# Altium PCB SV601121A.PcbDoc (part 1 of 2)
Units mil, origin at the board's own origin, x right, y up, seen from the top; angles counter-clockwise.
Board outline 1980 x 1700 mil, 6 copper layers (Top Layer, MidLayer1, MidLayer2, Mid-Layer 3, Mid-Layer 4, Bottom Layer), stack 61.3 mil thick; 85 components, 35 nets, 187 pads, 175 vias.
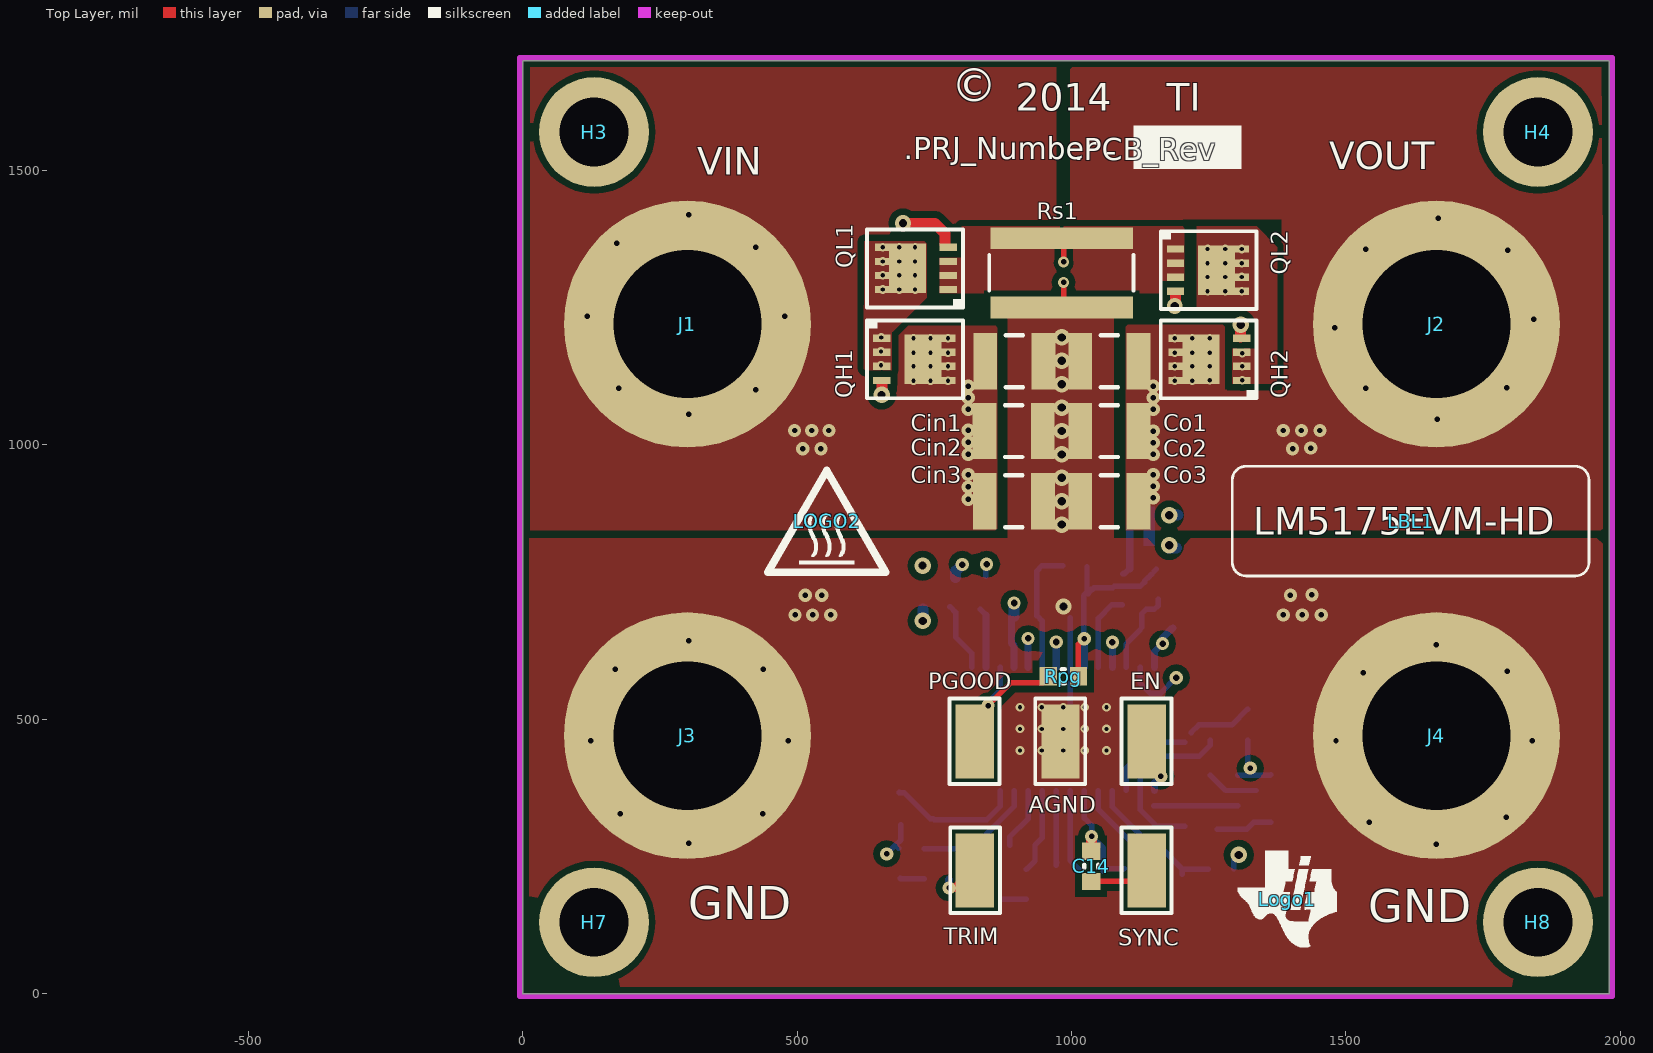
[diagram p0: Top Layer view]
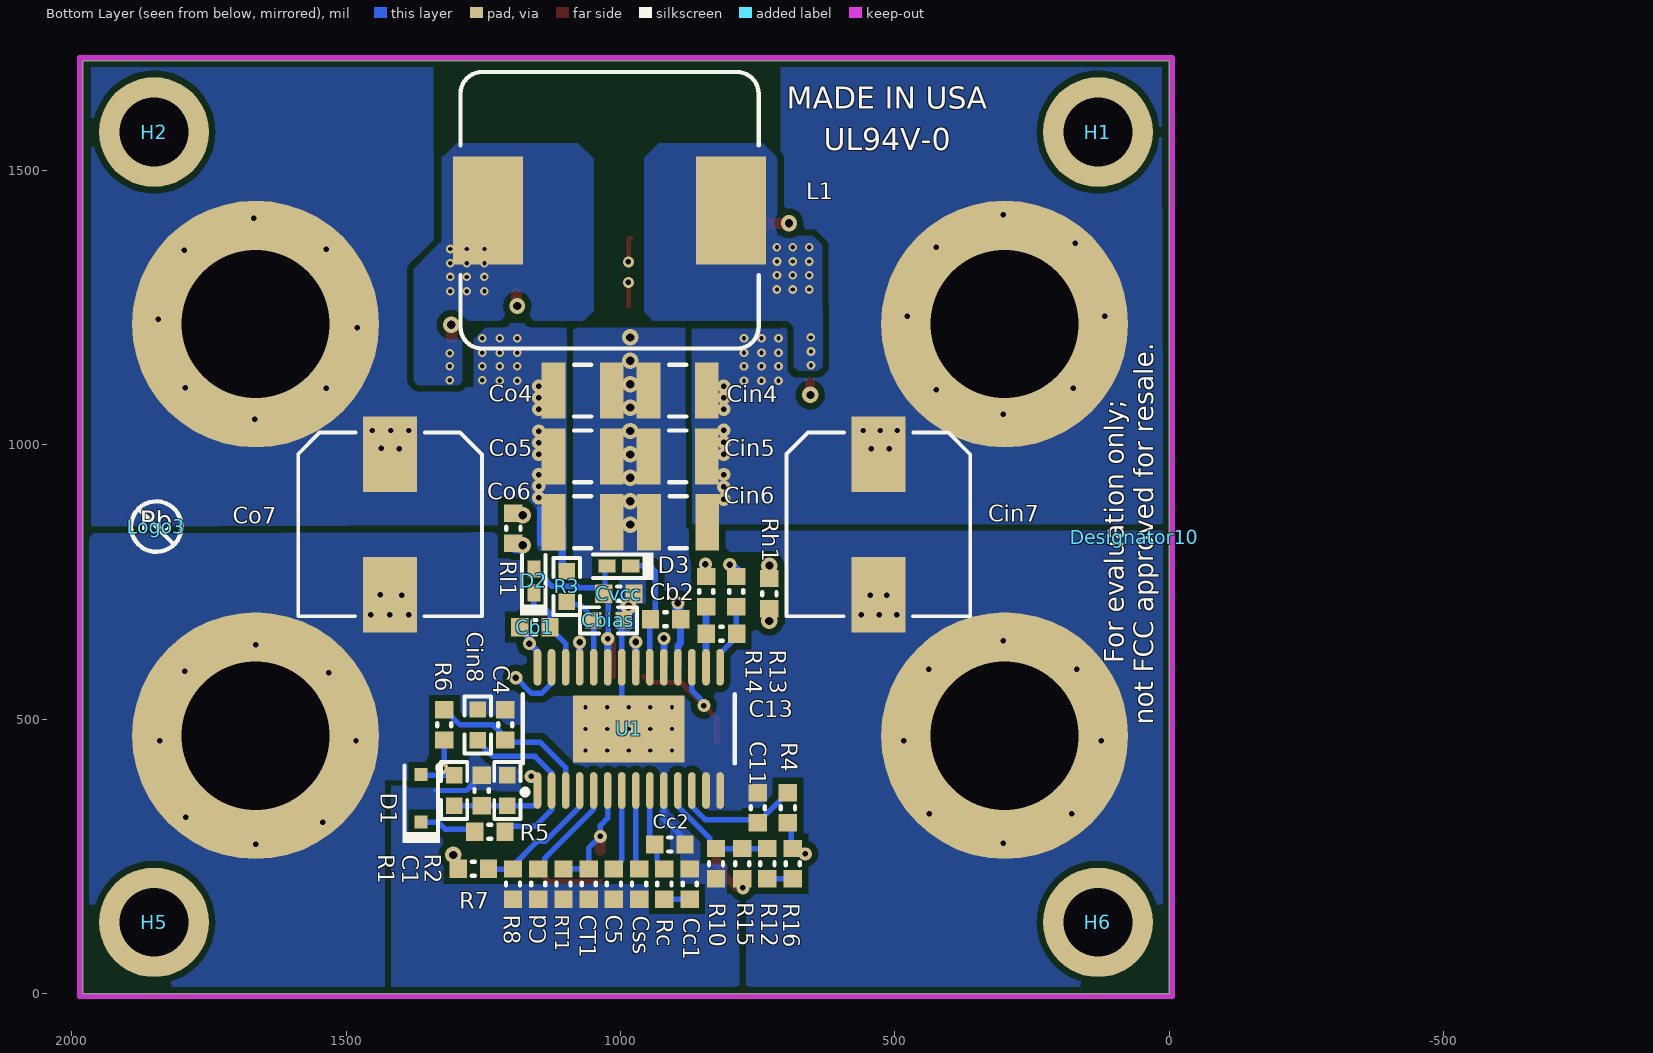
[diagram p1: Bottom Layer view, seen from below]
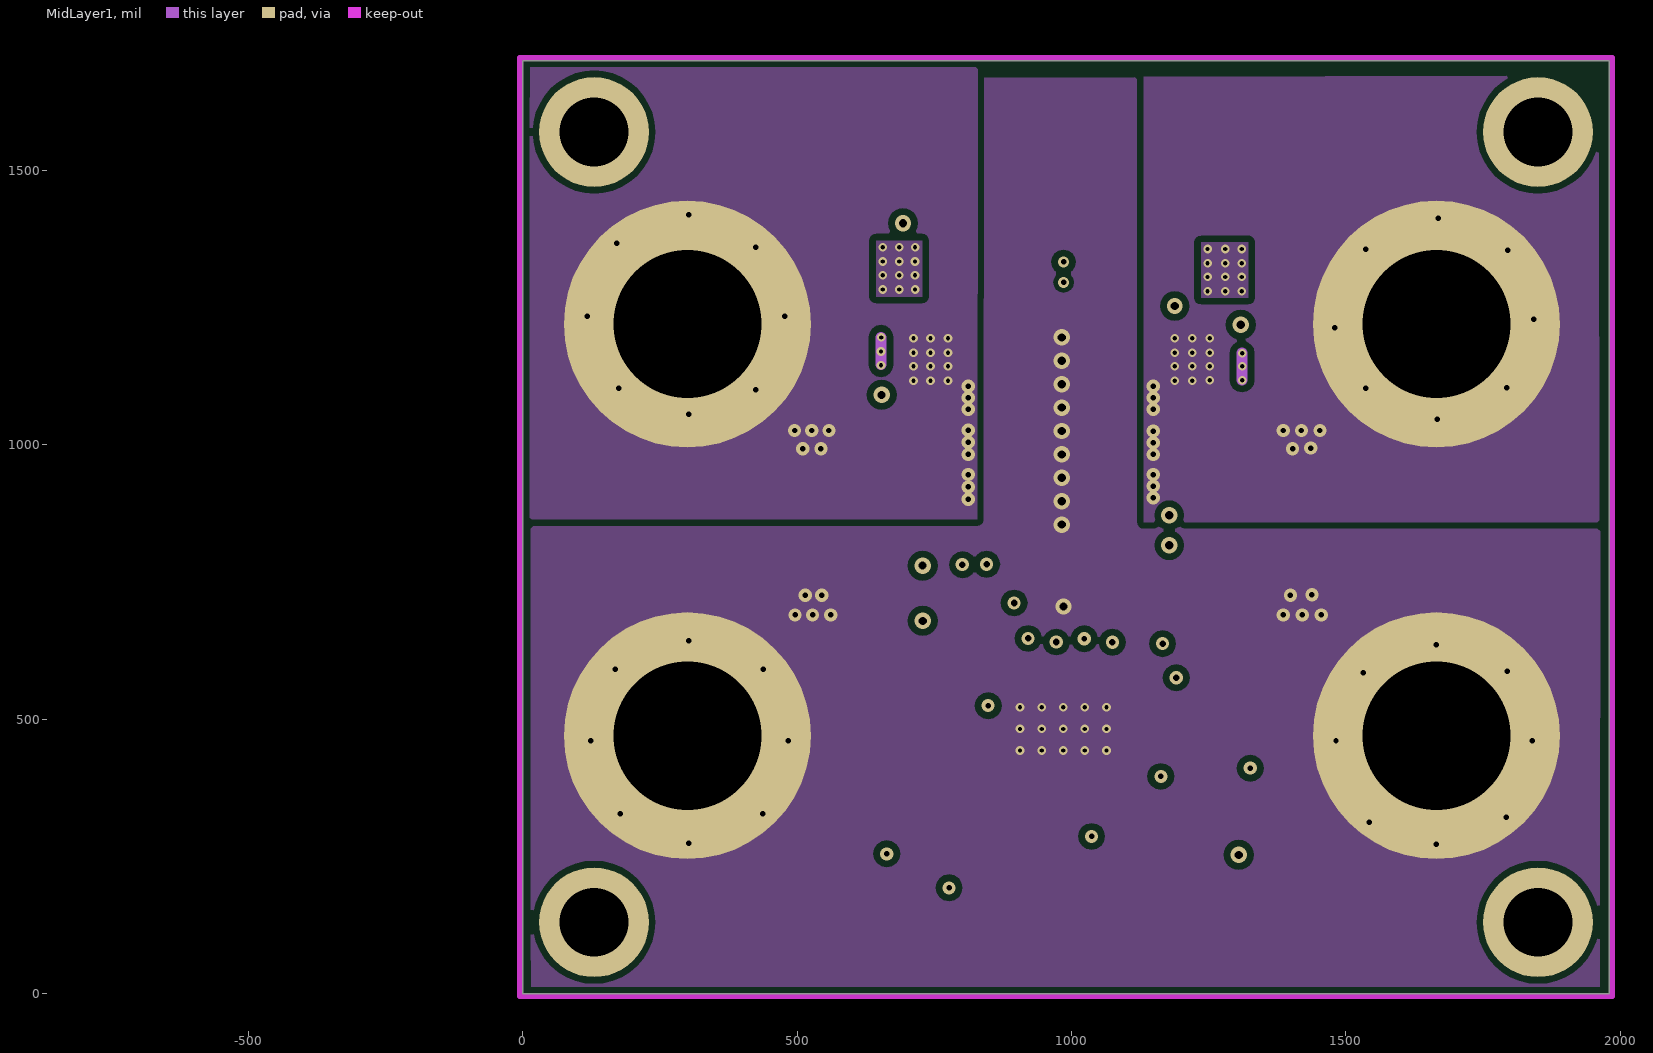
[diagram p2: MidLayer1]
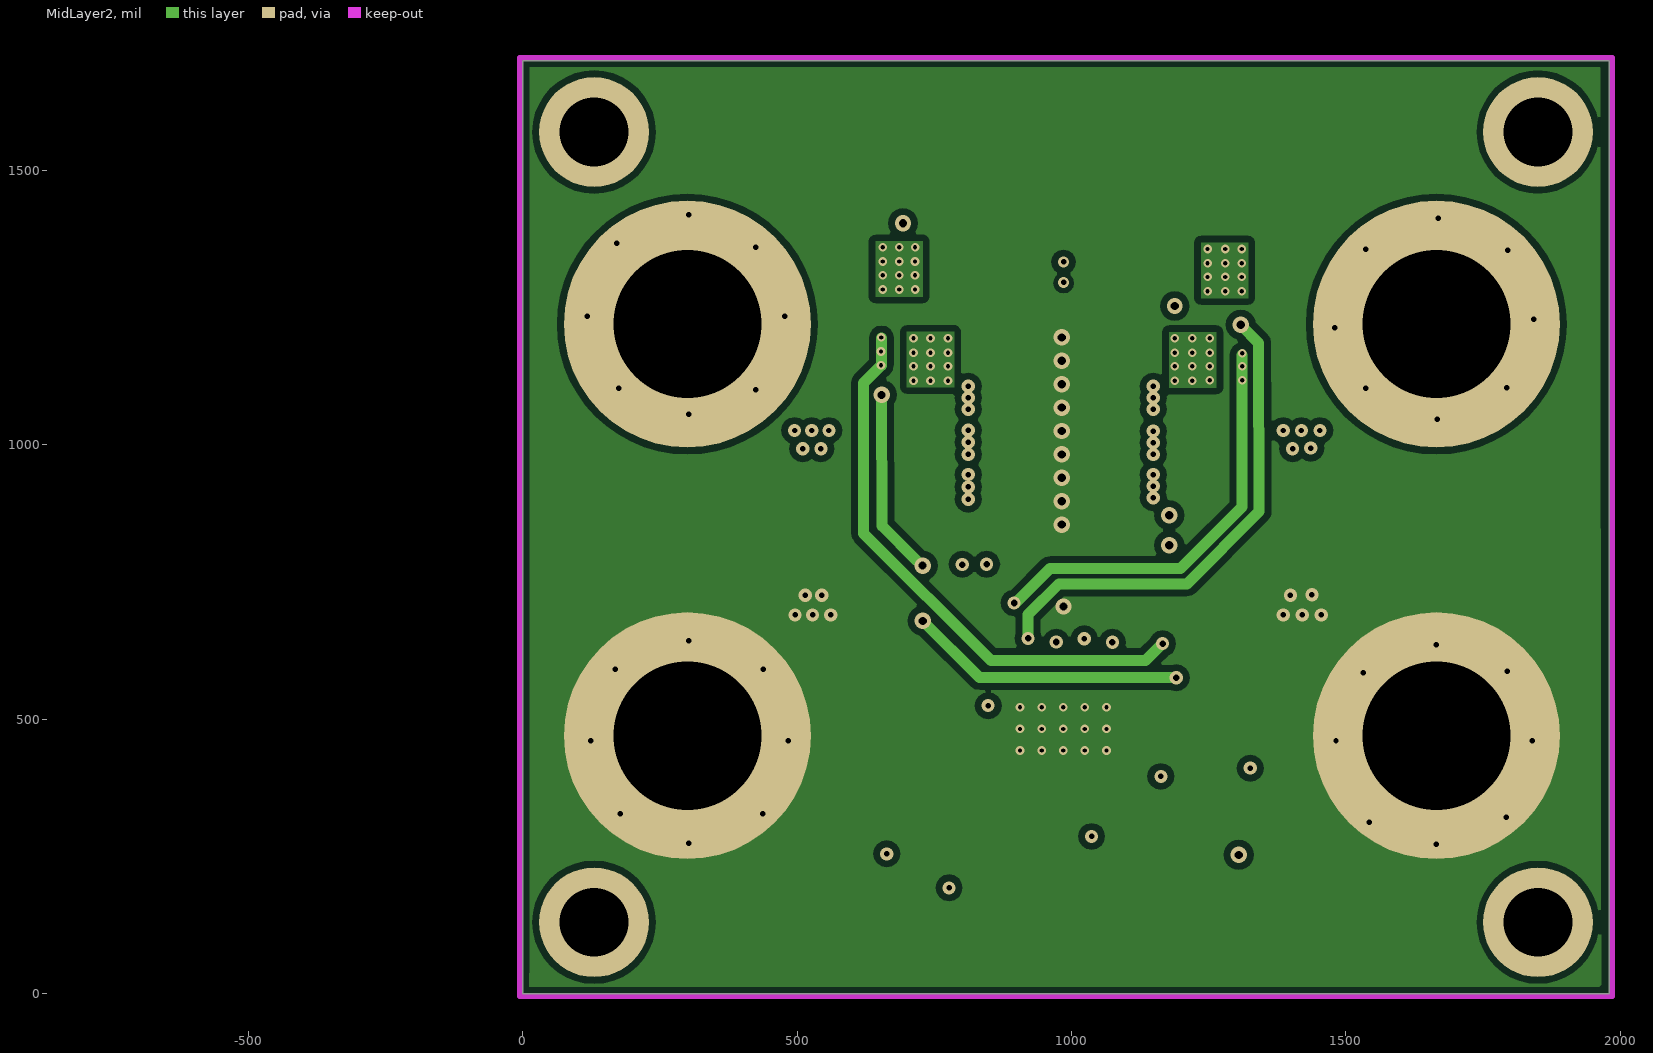
[diagram p3: MidLayer2]
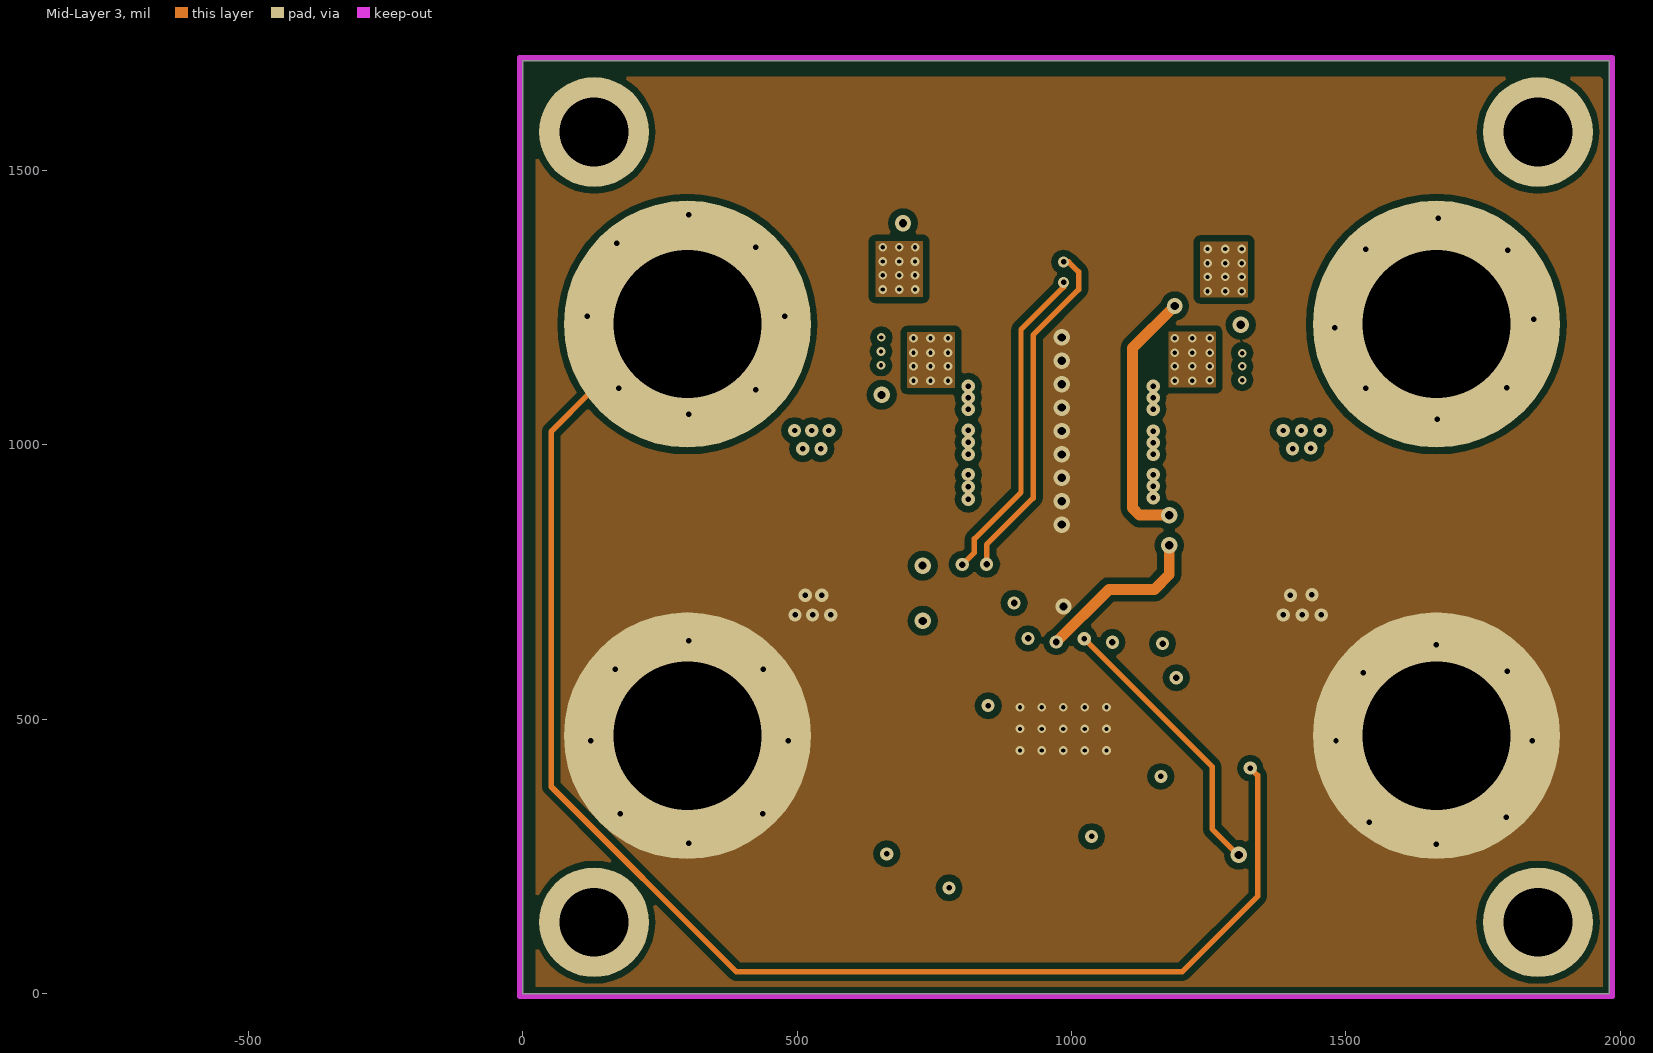
[diagram p4: Mid-Layer 3]
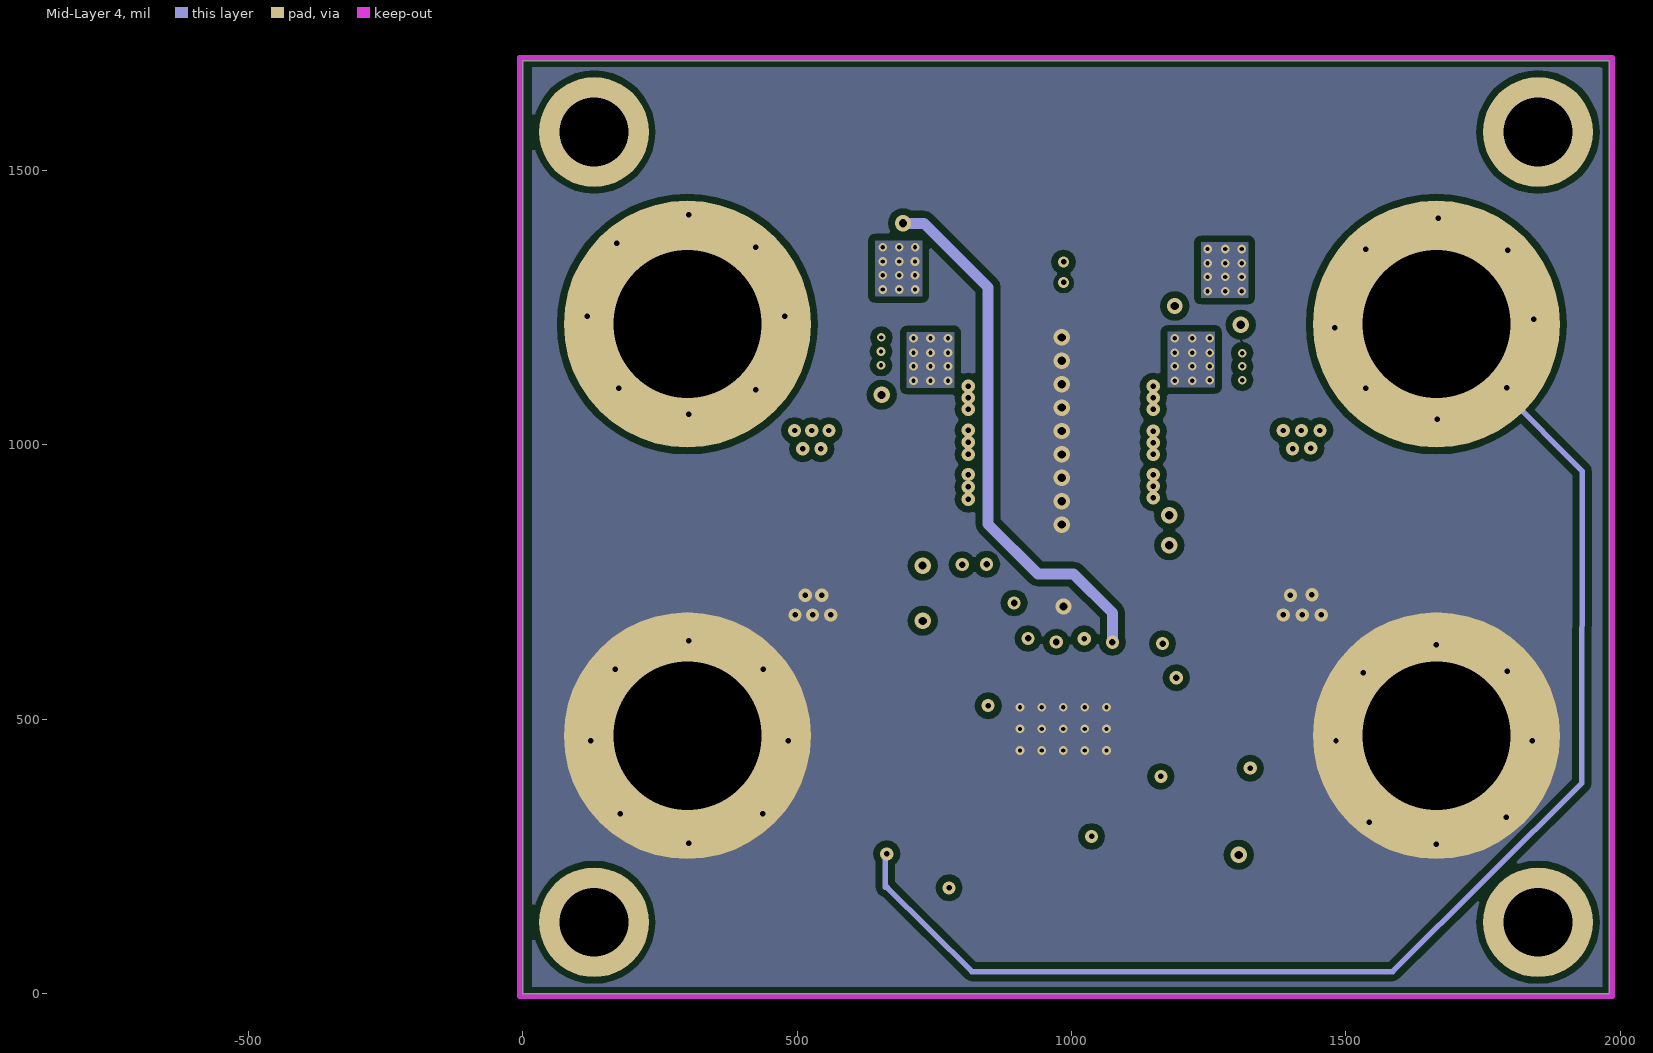
[diagram p5: Mid-Layer 4]

## Layer stack, top to bottom
Top Solder: solder mask 0.4, Solder Resist, Dk 3.5
Top Layer: signal copper 2.8
Dielectric1: core 8.9, FR-4, Dk 4.8
MidLayer1: signal copper 2.8
Dielectric2: prepreg 8.9, FR-4, Dk 4.8
MidLayer2: signal copper 2.8
Dielectric3: core 8.9, FR-4, Dk 4.8
Mid-Layer 3: signal copper 2.8
Dielectric4: prepreg 8.9, FR-4, Dk 4.8
Mid-Layer 4: signal copper 2.8
Dielectric5: core 8.9, FR-4, Dk 4.8
Bottom Layer: signal copper 2.8
Bottom Solder: solder mask 0.4, Solder Resist, Dk 3.5

## Board outline
0,0 0,1700 1980,1700 1980,0

## Design rules (kind name [scope] priority, off if disabled: settings)
AcuteAngle [All] p1: minimum=4.50000000000000E+0001 checktracksonly=FALSE
AssemblyTestPointUsage [All] p1: valid=2
Clearance Clearance_2 [InNet('NetQl1_1')] p1: gap=12 ignorepadtopadclearanceinfootprint=FALSE except(0: Arc-Hole Track-Hole SMDPad-Hole THPad-Hole Via-Hole Fill-Hole Poly-Hole Region-Hole Text-Hole)
Clearance Clearance_1 [InPolygon] p2: gap=12 ignorepadtopadclearanceinfootprint=FALSE except(0: Arc-Hole Track-Hole SMDPad-Hole THPad-Hole Via-Hole Fill-Hole Poly-Hole Region-Hole Text-Hole)
Clearance "Clearance_Polygon Board Edge" [InPolygon and OnCopper vs IsKeepout] p3: gap=25 ignorepadtopadclearanceinfootprint=FALSE except(0: Arc-Hole Track-Hole SMDPad-Hole THPad-Hole Via-Hole Fill-Hole Poly-Hole Region-Hole Text-Hole)
Clearance [All] p4: gap=8 ignorepadtopadclearanceinfootprint=FALSE except(0: Arc-Hole Track-Hole SMDPad-Hole THPad-Hole Via-Hole Fill-Hole Poly-Hole Region-Hole Text-Hole)
ComponentClearance ComponentClearance_1 [HasFootprint('SOT-23') vs HasFootprint('SOT-23')] p1: gap=5 collisioncheckmode=3 verticalgap=5 showdistances=FALSE
ComponentClearance "Output Cap Clearance" [InComponent('CO6') vs InComponent('CO7')] p2: gap=10 collisioncheckmode=3 verticalgap=0 showdistances=FALSE
ComponentClearance "MOSFET Clearance" [HasFootprint('PG-TDSON-8') vs HasFootprint('PG-TDSON-8')] p3: gap=10 collisioncheckmode=3 verticalgap=0 showdistances=FALSE
ComponentClearance ComponentClearance_Logo [InComponentClass('Logo')] p4: gap=5 collisioncheckmode=3 verticalgap=5 showdistances=FALSE
ComponentClearance ComponentClearance_ScrewToNut [(HasFootprint('NY PMS 440 0025 PH')) vs (HasFootprint('Keystone_1902C'))] p5: gap=5 collisioncheckmode=3 verticalgap=10 showdistances=FALSE
ComponentClearance ComponentClearance_MountingHoles [InComponentClass('Mounting Holes')] p6: gap=5 collisioncheckmode=3 verticalgap=100000 showdistances=FALSE
ComponentClearance ComponentClearance_SmallPassives [HasFootprint('0201*') or HasFootprint('0402*') or HasFootprint('0508') or HasFootprint('0603*') or HasFootprint('0612') or HasFootprint('0805*') or HasFootprint('0815*') or HasFootprint('0830*') or HasFootprint('1206*') or HasFootprint('1210*') or HasFootprint('1808*') or HasFootprint('1812*') or HasFootprint('1825*') or HasFootprint('2010*') or HasFootprint('2220*') or HasFootprint('2225*') or HasFootprint('2512*') or HasFootprint('2728*') or HasFootprint('3518*') vs HasFootprint('0201*') or HasFootprint('0402*') or HasFootprint('0508') or HasFootprint('0603*') or HasFootprint('0612') or HasFootprint('0805*') or HasFootprint('0815*') or HasFootprint('0830*') or HasFootprint('1206*') or HasFootprint('1210*') or HasFootprint('1808*') or HasFootprint('1812*') or HasFootprint('1825*') or HasFootprint('2010*') or HasFootprint('2220*') or HasFootprint('2225*') or HasFootprint('2512*') or HasFootprint('2728*') or HasFootprint('3518*')] p7: gap=8 collisioncheckmode=3 verticalgap=2 showdistances=FALSE
ComponentClearance ComponentClearance_THtoSMT [IsThruComponent vs IsSMTComponent] p8: gap=10 collisioncheckmode=3 verticalgap=20 showdistances=FALSE
ComponentClearance ComponentClearance_THtoTH [IsThruComponent vs IsThruComponent] p9: gap=20 collisioncheckmode=3 verticalgap=30 showdistances=FALSE
ComponentClearance [All] p10: gap=10 collisioncheckmode=3 verticalgap=5 showdistances=TRUE
DiffPairsRouting [All] p1: maxlimit=100 minlimit=10 mostfreqgap=10 toplayer_minwidth=15 toplayer_maxwidth=15 toplayer_prefwidth=15 midlayer1_minwidth=15 midlayer1_maxwidth=15 midlayer1_prefwidth=15 midlayer2_minwidth=15 midlayer2_maxwidth=15 midlayer2_prefwidth=15 midlayer3_minwidth=15 midlayer3_maxwidth=15 midlayer3_prefwidth=15 midlayer4_minwidth=15 midlayer4_maxwidth=15 midlayer4_prefwidth=15 bottomlayer_minwidth=15 bottomlayer_maxwidth=15 bottomlayer_prefwidth=15 maxuncoupledlength=1000
FabricationTestPointUsage TestPointUsage [All] p1: valid=2 allowmultiple=FALSE
FabricationTestpoint Testpoint [All] p1: side=3 testpointundercomponent=TRUE minsize=40 maxsize=100 preferedsize=60 minholesize=0 maxholesize=40 preferedholesize=32 testpointgrid=1 allowsidetop=TRUE allowsidebottom=TRUE usegrid=TRUE gridtolerance=0.01
FanoutControl Fanout_LCC [IsLCC] p1: bgadir=Out bgaviamode=Centered fanoutstyle=Auto fanoutdirection=Alternating viagrid=1 // Fanout_LCC (Default Rule)
FanoutControl Fanout_BGA [IsBGA] p2: bgadir=Out bgaviamode=Centered fanoutstyle=Auto fanoutdirection=Alternating viagrid=1 // Fanout_BGA (Default Rule)
FanoutControl Fanout_Default [All] p4: bgadir=Out bgaviamode=Centered fanoutstyle=Auto fanoutdirection=Alternating viagrid=1 // Fanout_Default (Default Rule)
FanoutControl Fanout_Small [(CompPinCount < 5)] p5: bgadir=Out bgaviamode=Centered fanoutstyle=Auto fanoutdirection=OutThenIn viagrid=1 // Fanout_Small (Default Rule)
HoleSize [All] p1: absolutevalues=TRUE maxlimit=280 minlimit=6 maxpercent=80.000 minpercent=20.000
HoleToHoleClearance [All] p1: gap=5 allowstackedmicrovias=TRUE
MinimumAnnularRing [All] p1: minimumring=2
MinimumSolderMaskSliver MinimumSolderMaskSliver_Logo [InComponentClass('Logo') vs InComponentClass('Logo')] p1: minsoldermaskwidth=0.7
MinimumSolderMaskSliver [All] p2: minsoldermaskwidth=2
PlaneClearance [All] p1: clearance=15
PlaneConnect [All] p1: planeconnectstyle=Direct reliefexpansion=10 reliefentries=4 reliefconductorwidth=10 reliefairgap=10
PolygonConnect [All] p1: connectstyle=Direct reliefconductorwidth=10 reliefentries=4 polygonreliefangle="90 Angle" airgapwidth=10
RoutingVias [All] p1: holewidth=12 width=24 viastyle="Through Hole" minholewidth=7.87 minwidth=15.75 maxholewidth=40 maxwidth=65
SMDToCorner [All] p1: distance=0
SilkToBoardRegionClearance [NOT((IsComment OR IsDesignator) AND (Hide <> 'FAIL'))AND NOT InRegion (100,500,4000,800)] p1:
SilkToSilkClearance [All vs All  AND NOT (InComponent('Logo3'))] p1: silktosilkclearance=2
SilkToSolderMaskClearance SilkscreenOverComponentPads [IsPad] p1: minsilkscreentomaskgap=1 clearancetoexposedcopper=TRUE
SolderMaskExpansion [All] p1: expansion=3 istentingtop=FALSE
Width [All] p1: maxlimit=100 minlimit=6 preferedwidth=10 checkconnectedcopper=TRUE
13 further rules are at their usual default settings.

## Classes and differential pairs
component class "Mounting Holes": H3 H4 H7 H8
component class Logo: Logo1
component class SV601121A_HW: Designator10 H1 H2 H3 H4 H5 H6 H7 H8 LBL1 Logo1 LOGO2 Logo3 ZZ1 ZZ2 ZZ3 ZZ4
component class AssemblyNote: ZZ1 ZZ2 ZZ3 ZZ4
component class Label: LBL1
component class SV601121A: 6 AGND C1 C3 C4 C5 C11 C13 C14 Cb1 Cb2 Cbias Cc1 Cc2 Cd Cin1 Cin2 Cin3 Cin4 Cin5 Cin6 Cin7 Cin8 CO1 CO2 CO3 CO4 CO5 CO6 Co7 Css CT1 Cvcc D1 D2 D3 EN J1 J2 J3 J4 L1 NT1 PGOOD QH1 QH2 QL1 QL2 R1 R2 R3 R4 R5 R6 R7 R8 R10 R12 R13 R14 R15 R16 Rc Rh1 Rl1 Rpg Rs1 RT1 SYNC TRIM U1

## Components (designator, comment, footprint, x,y, rotation, side; value= is the part's Value field where it differs from the comment)
AGND "5015" Testpoint_Keystone_Miniature 980,459.75 r270 top
C1 "GRM1885C1H101JA01D" 0603L 1253.16,370.16 r270 bottom
C4 "GRM1885C1H101JA01D" 0603L 1210,489.75 r270 bottom
C5 "GRM1885C1H121JA01D" 0603L 1012,199.75 r270 bottom
C11 "GRM1885C1H101JA01D" 0603L 750,338.75 r90 bottom
C13 "GRM1885C1H470JA01D" 0603L 816,655.75 r0 bottom
C14 "CGA3E2NP01H101J080AA" 0603L 1035.77,232 r270 top
Cb1 "GCM188R71H104KA57D" 0603L 1155.96,667.75 r0 bottom
Cb2 "GCM188R71H104KA57D" 0603L 917.96,682 r0 bottom
Cbias "C1608X7R1H224K080AB" 0603_HV 1021.96,680 r180 bottom
Cc1 "GRM188R71H223KA01D" 0603L 874,199.75 r90 bottom
Cc2 "GRM1885C1H221JA01D" 0603L 910,271.75 r0 bottom
Cd "RC0603JR-070RL" 0603L 1150,199.75 r90 bottom
Cin1 "GRM32ER71H106KA12L" 1210L 895.96,1152.37 r0 top
Cin2 "GRM32ER71H106KA12L" 1210L 894.51,1025.14 r0 top
Cin3 "GRM32ER71H106KA12L" 1210L 895.12,897.08 r0 top
Cin4 "GRM32ER71H106KA12L" 1210L 895.96,1098.75 r0 bottom
Cin5 "GRM32ER71H106KA12L" 1210L 895.96,979 r0 bottom
Cin6 "GRM32ER71H106KA12L" 1210L 894.96,859 r0 bottom
Cin7 "EEHZC1H680P" SM_RADIAL_8MM 530,855 r270 bottom
Cin8 "C1608X7R1H224K080AB" 0603_HV 1260,489.75 r90 bottom
Co1 "GRM32ER71H106KA12L" 1210L 1069.11,1152.37 r180 top
Co2 "GRM32ER71H106KA12L" 1210L 1069.11,1025.14 r180 top
Co3 "GRM32ER71H106KA12L" 1210L 1069.11,897.08 r180 top
Co4 "GRM32ER71H106KA12L" 1210L 1068.96,1098.75 r180 bottom
Co5 "GRM32ER71H106KA12L" 1210L 1068.96,979 r180 bottom
Co6 "GRM32ER71H106KA12L" 1210L 1068.96,859 r180 bottom
Co7 "EEHZC1H680P" SM_RADIAL_8MM 1420,855 r270 bottom
Css "GRM188R71H473KA61D" 0603L 966.16,199.75 r270 bottom
CT1 "DNP" 0603L 1058,199.75 r90 bottom
Cvcc "GRM188R71C105KA12D" 0603L 1002.9,729 r180 bottom
D1 "BAT54HT1G" sod-323 1363.16,355.75 r90 bottom
D2 "BAS516,115" SOD-523 1158,752 r90 bottom
D3 "BAS516,115" SOD-523 1002.9,779 r0 bottom
Designator10 "FCC disclaimer" FCC_disclaimer_stacked 64,832 r90 bottom
EN "5015" Testpoint_Keystone_Miniature 1137,459.75 r270 top
H1 "1902C" Keystone_1902C 130,1570 r180 bottom
H2 "1902C" Keystone_1902C 1850,1570 r180 bottom
H3 "NY PMS 440 0025 PH" "NY PMS 440 0025 PH" 130,1570 r0 top
H4 "NY PMS 440 0025 PH" "NY PMS 440 0025 PH" 1850,1570 r0 top
H5 "1902C" Keystone_1902C 1850,130 r180 bottom
H6 "1902C" Keystone_1902C 130,130 r180 bottom
H7 "NY PMS 440 0025 PH" "NY PMS 440 0025 PH" 130,130 r0 top
H8 "NY PMS 440 0025 PH" "NY PMS 440 0025 PH" 1850,130 r0 top
J1 "VIN 6V TO 42V" Johnson_108-0740-001 300,1220 r0 top
J2 "VOUT" Johnson_108-0740-001 1665,1220 r180 top
J3 "GND" Johnson_108-0740-001 300,470 r0 top
J4 "GND" Johnson_108-0740-001 1665,470 r180 top
L1 "3.3uH" PIMB135T 1020,1427.41 r0 bottom
LBL1 "LM5175EVM-HD" Label_650x200 1618,861 r0 top
Logo1 "Texas Instruments" TI_Symbol_Overlay_Small 1393,172 r0 top
LOGO2 "CAUTION HOT SURFACE" IEC_HotSurface_Small 554,861 r0 top
Logo3 "Pb-Free Symbol" Pb-Free_Overlay_Small 1846,851 r180 bottom
PGOOD "5015" Testpoint_Keystone_Miniature 824,459.75 r270 top
QH1 "BSZ042N06NS" PG-TSDSON-8 714.96,1155.75 r0 top
QH2 "BSZ0902NS" PG-TSDSON-8 1249.96,1155.75 r180 top
QL1 "BSZ042N06NS" PG-TSDSON-8 714.96,1321.42 r180 top
QL2 "BSZ0902NS" PG-TSDSON-8 1249.96,1318.42 r0 top
R1 "RC0603FR-07200KL" 0603_HV 1303.16,370.16 r90 bottom
R2 "RC0603FR-0752K3L" 0603_HV 1206.16,370.16 r270 bottom
R3 "RC0603FR-0710RL" 0603_HV 1098,742 r90 bottom
R4 "CRCW060310R0FKEA" 0603L 695,338.75 r270 bottom
R5 "RC0603FR-0710RL" 0603L 1238,295 r0 bottom
R6 "RC0603FR-0710RL" 0603L 1321,489.75 r90 bottom
R7 "CRCW06030000Z0EA" 0603L 1268,227.75 r0 bottom
R8 "CRCW0603200KFKEA" 0603L 1196,199.75 r90 bottom
R10 "RC0603FR-077K15L" 0603L 825.96,236.75 r270 bottom
R12 "RC0603FR-07100KL" 0603L 732.29,236.75 r90 bottom
R13 "RC0603FR-07100RL" 0603L 843.56,732.75 r90 bottom
R14 "RC0603FR-07100RL" 0603L 789,732.75 r90 bottom
R15 "RC0603FR-076K65L" 0603L 778,236.75 r90 bottom
R16 "CRCW060350R0FKEA" 0603L 685.96,236.75 r270 bottom
Rc "RC0603FR-073K01L" 0603L 920,199.75 r90 bottom
Rh1 "CRCW06030000Z0EA" 0603L 728.66,728.75 r90 bottom
Rl1 "CRCW06030000Z0EA" 0603L 1195.16,848 r270 bottom
Rpg "RC0603FR-0720KL" 0603L 985.16,578.05 r180 top
Rs1 "0.007" 2512_WIDE 982.03,1313.32 r90 top
RT1 "RC0603FR-0760K4L" 0603L 1104,199.75 r90 bottom
SYNC "5015" Testpoint_Keystone_Miniature 1137,224.75 r270 top
TRIM "5015" Testpoint_Keystone_Miniature 824,224.75 r90 top
U1 "LM5175PWPR" PWP0028F_N 984.96,482.37 r90 bottom
ZZ1 "This Assembly Note is for PCB labels only" AssemblyNoteLabel 264,2684 r0 top
ZZ2 "These assemblies are ESD sensitive, ESD precautions shall be observed." AssemblyNote 248,2566 r0 top
ZZ3 "These assemblies must be clean and free from flux and all contaminants. Use of no clean flux is not acceptable." AssemblyNote 254,2459 r0 top
ZZ4 "These assemblies must comply with workmanship standards IPC-A-610 Class 2., unless otherwise specified." AssemblyNote 254,2335 r0 top

## Footprints (in the part's own frame and the unit in brackets; to place one, negate y for a bottom-side part, rotate by r counter-clockwise, add the part's x,y. Pads: shape width x height; smd on the part's side, far side on the other; paste and mask are expansions set on the pad)
0603_HV [mil] "Ernesto recommended land pattern.  26 mil between pads."
  rect 30x30 smd: 1(-28,0) 2(28,0)
  silkscreen extent -52,-24 52,24, body extent -34,-19 34,19, height 33
0603L [mm] "0603 from SM-752 data"
  rect 0.8x0.85 smd: 1(-0.7,0) 2(0.7,0)
  silkscreen extent -0.07,-0.33 0.07,0.33, body extent -0.87,-0.47 0.87,0.47, height 0.85
1210L [mm] "1210 from SM-752 data"
  rect 1.1x2.6 smd: 1(-1.35,0) 2(1.35,0)
  silkscreen extent -0.4,-1.2 0.4,1.2, body extent -1.7,-1.35 1.7,1.35, height 1.35
2512_WIDE [mm] "Ohmite recommended land pattern"
  rect 1x6.6 smd: 1(-1.6,0) 2(1.6,0)
  silkscreen extent -0.82,-3.32 0.82,3.35, body extent -1.65,-3.25 1.65,3.25, height 0.7
AssemblyNote [mil] "Assembly Note"
AssemblyNoteLabel [mil] "Assembly Note for PCB Labels"
FCC_disclaimer_stacked [mil]
IEC_HotSurface_Small [mil]
  silkscreen extent -107,-93 107,92
Johnson_108-0740-001 [mil] "Banana Jack Uninsulated Standard Type"
  round 450 hole 270: 1(0,0)
  body extent -188,-214 187,219, height 94
Keystone_1902C [mil] "Hex Standoff, 4-40 threaded, nylon"
  body extent -145,-126 146,126, height 501
Label_650x200 [mil] "Thermal Transfer Label"
  round 1 on Mech13: 0(0,0)
  silkscreen extent -325,-100 325,100, body extent -325,-100 325,100, height 1
"NY PMS 440 0025 PH" [mil] "4-40 nylon screw and mounting hole"
  round 200 hole 125: ""(0,0)
  body extent -130,-130 130,130, height 106
Pb-Free_Overlay_Small [mil]
  silkscreen extent -46,-46 46,46
PG-TSDSON-8 [mm] "Infineon recommended land pattern"
  rect 0.8x0.34 smd: 1(-1.538,0.975) 2(-1.538,0.325) 3(-1.538,-0.325) 4(-1.538,-0.975)
  rect 0.65x0.34 smd: 5(1.538,-0.975) 6(1.538,-0.325) 7(1.538,0.325) 8(1.538,0.975)
  rect 1.71x2.29 smd: 9(0.358,0)
  silkscreen extent -2.22,-1.8 2.22,1.8, body extent -1.7,-1.7 1.7,1.7, height 1.1
PIMB135T [mm] "CYNTEC CO."
  rect 3.25x5 smd: 1(-5.625,0) 2(5.625,0)
  silkscreen extent -6.9,-6.4 6.9,6.4, body extent -6.9,-6.4 6.9,6.4, height 5
PWP0028F_N [mm] "TSOP, 28-Leads, Body 9.7x4.4mm, Pitch 0.65mm, Exposed Pad, IPC Medium Density"
  oval 1.7x0.35 smd: 1(-2.85,4.225) 2(-2.85,3.575) 3(-2.85,2.925) 4(-2.85,2.275) 5(-2.85,1.625) 6(-2.85,0.975) 7(-2.85,0.325) 8(-2.85,-0.325) 9(-2.85,-0.975) 10(-2.85,-1.625) 11(-2.85,-2.275) 12(-2.85,-2.925) 13(-2.85,-3.575) 14(-2.85,-4.225) 15(2.85,-4.225) 16(2.85,-3.575) 17(2.85,-2.925) 18(2.85,-2.275) 19(2.85,-1.625) 20(2.85,-0.975) 21(2.85,-0.325) 22(2.85,0.325) 23(2.85,0.975) 24(2.85,1.625) 25(2.85,2.275) 26(2.85,2.925) 27(2.85,3.575) 28(2.85,4.225)
  rect 3.1x5.18 smd: 29(0,0)
  silkscreen extent -3.05,-4.9 1.6,4.93, body extent -3.21,-4.85 3.21,4.85, height 0.98
SM_RADIAL_8MM [mm] "Nichicon 8x10"
  rect 3.5x2.5 smd: 1(-3.25,0) 2(3.25,0)
  silkscreen extent -4.25,-4.25 4.25,4.25, body extent -4.25,-4.25 4.25,4.25, height 10.5
sod-323 [mm] "NXP recommended land pattern"
  rect 0.6x0.6 smd paste-0.05: 1(-1.1,0) 2(1.1,0)
  silkscreen extent -2.06,-0.86 1.53,0.86, body extent -1.3,-0.67 1.3,0.68, height 1.1
SOD-523 [mm] "NXP Semiconductor recommended land pattern, nominal STEP model"
  rect 0.8x0.6 smd paste-0.05: 1(-0.55,0) 2(0.55,0)
  silkscreen extent -1.6,-0.63 1.2,0.64, body extent -0.8,-0.4 0.8,0.4, height 0.72
Testpoint_Keystone_Miniature [mil] "Miniature SMT test point"
  rect 135x70 smd: 1(0,0)
  silkscreen extent -78,-46 78,45, body extent -52,-20 52,20, height 61
TI_Symbol_Overlay_Small [mil]
  silkscreen extent -90,-88 91,88

## Part data
AGND EN PGOOD SYNC TRIM: "Test Point, Miniature, SMT"
C1 C4 C11 C14: "CAP, CERM, 100pF, 50V, +/-5%, C0G/NP0, 0603"
C5: "CAP, CERM, 120pF, 50V, +/-5%, C0G/NP0, 0603"
C13: "CAP, CERM, 47pF, 50V, +/-5%, C0G/NP0, 0603"
Cb1 Cb2: "CAP, CERM, 0.1uF, 50V, +/-10%, X7R, 0603"
Cbias Cin8: "CAP, CERM, 0.22uF, 50V, +/-10%, X7R, 0603"
Cc1: "CAP, CERM, 0.022 礔, 50 V, +/- 10%, X7R, 0603"
Cc2: "CAP, CERM, 220 pF, 50 V, +/- 5%, C0G/NP0, 0603"
Cd: "RES, 0, 5%, 0.1 W, 0603"
Cin1 Cin2 Cin3 Cin4 Cin5 Cin6: "CAP, CERM, 10uF, 50V, +/-10%, X7R, 1210"
Cin7 Co7: "CAP, AL, 68 礔, 50 V, +/- 20%, 30 ohm, SMD"
Co1 Co2 Co3 Co4 Co5 Co6: "CAP, CERM, 10 礔, 50 V, +/- 10%, X7R, 1210"
Css: "CAP, CERM, 0.047 礔, 50 V, +/- 10%, X7R, 0603"
CT1: library part GRM1885C1H101JA01D, "CAP, CERM, 100pF, 50V, +/-5%, C0G/NP0, 0603"
Cvcc: "CAP, CERM, 1uF, 16V, +/-10%, X7R, 0603"
D1: "Diode, Schottky, 30V, 0.2A, SOD-323"
D2 D3: "Diode, Switching, 100V, 0.25A, SOD-523"
Designator10: library part FCC_disclaimer, "FCC_disclaimer"
H1 H2 H5 H6: "Standoff, Hex, 0.5\"L #4-40 Nylon"
H3 H4 H7 H8: "Machine Screw, Round, #4-40 x 1/4, Nylon, Philips panhead"
J1 J2 J3 J4: library part 108-0740-001, "Standard Banana Jack, Uninsulated, 15A"
L1: library part PIMB135T-3R3MS, "Inductor, Drum Core, Powdered Iron, 3.3uH, 14A, 0.007 ohm, SMD"
LBL1: library part THT-14-423-10, "Thermal Transfer Printable Labels, 0.650\" W x 0.200\" H - 10,000 per roll"
Logo1: library part TI_Logo, "Texas Instrument Corporate Signature"
LOGO2: library part IEC_HotSurface, "IEC 61010-1 Hot Surface Warning"
Logo3: library part Pb-Free
QH1 QL1: "MOSFET N-CH 60V 19A 8TSDSON"
QH2 QL2: "MOSFET, N-CH, 30V, 40A, PG-TSDSON-8"
R1: "RES, 200k ohm, 1%, 0.1W, 0603"
R2: "RES, 52.3 k, 1%, 0.1 W, 0603"
R3 R5 R6: "RES, 10.0 ohm, 1%, 0.1W, 0603"
R4: "RES, 10.0, 1%, 0.1 W, 0603"
R7 Rh1 Rl1: "RES, 0 ohm, 5%, 0.1W, 0603"
R8: "RES, 200 k, 1%, 0.1 W, 0603"
R10: "RES, 7.15k ohm, 1%, 0.1W, 0603"
R12: "RES, 100k ohm, 1%, 0.1W, 0603"
R13 R14: "RES, 100 ohm, 1%, 0.1W, 0603"
R15: "RES, 6.65 k, 1%, 0.1 W, 0603"
R16: "RES, 50, 1%, 0.1 W, 0603"
Rc: "RES, 3.01k ohm, 1%, 0.1W, 0603"
Rpg: "RES, 20.0 k, 1%, 0.1 W, 0603"
Rs1: library part KRL6432E-M-R007-F-T1, "RES 0.007 OHM 3W 1% 2512 WIDE"
RT1: "RES, 60.4 k, 1%, 0.1 W, 0603"
U1: "42V Wide VIN 4-Switch Synchronous Buck-Boost Controller, PWP0028F"
ZZ1: library part AssemblyNoteLabel
ZZ2 ZZ3 ZZ4: library part AssemblyNote

## Via types
v1: diameter 24, hole 10, Top Layer to Bottom Layer, tented both sides, 77 vias
v2: diameter 15.75, hole 7.87, Top Layer to Bottom Layer, tented both sides, 54 vias
v3: diameter 30, hole 15, Top Layer to Bottom Layer, tented both sides, 17 vias
v4: diameter 15.75, hole 7.87, Top Layer to Bottom Layer, 15 vias
v5: diameter 24, hole 12, Top Layer to Bottom Layer, tented both sides, 8 vias
v6: diameter 20, hole 10, Top Layer to Bottom Layer, tented both sides, 2 vias
v7: diameter 29, hole 15, Top Layer to Bottom Layer, tented both sides, 2 vias

## Nets (pads, with @x,y where several pads share a name; then routed paths per layer and width w, separated by ;. In a path a pad name is that pad's centre, name@x,y a point inside that pad or via, vN(x,y) a via of type N, cw(c..) or ccw(c..) an arc to the next point about the centre after c; other vN are vias at no path point)
BIAS: Cbias.1 R3.1 U1.24 | length 143.5
  Bottom Layer w10: U1.24@1048.93,594.57 1048.93,683.72 1073.96,708.75 R3.1@1092.96,708.75
BOOT1: Cb1.1 D2.1 U1.26 | length 150.6
  Bottom Layer w10: U1.26@1100.11,594.57 1100.11,637.89 Cb1.1@1124.75,662.53 ; Cb1.1@1128.4,667.75 1128.4,692.52 1135.88,700 1150.53,700 1158,706.59 D2.1@1158,719.09
BOOT2: Cb2.2 D3.1 U1.20 | length 230.8
  Bottom Layer w10: U1.20@946.57,594.57 946.57,679.15 936.97,688.75 936.97,770.07 946.65,779.75 D3.1@984.3,779.75
COMP: Cc2.2 Rc.2 U1.9 | length 155.7
  Bottom Layer w10: Rc.2@917.96,226.31 933.52,241.86 933.52,270.75 946.57,283.8 U1.9@946.57,370.16
DITH: Cd.2 U1.5 | length 187.9
  Bottom Layer w10: U1.5@1048.93,370.16 1048.93,335.81 1138.1,246.64 1138.1,237.59 Cd.2@1151.1,224.59
EN: C1.2 EN.1 R1.1 R2.2 U1.1 | length 183.4
  Bottom Layer w10: U1.1@1150.16,342.6 1206.16,342.6 R1.1@1303.16,342.6
  Bottom Layer w13: U1.1@1151.3,370.16 1151.3,384.23 v1(1162.81,395.75)
FB: R10.1 R12.2 R15.2 U1.11 | length 221.2
  Bottom Layer w10: R12.2@731.96,264.31 R12.2@732.29,264.31 R15.2@778,264.31 R10.1@818.48,264.31 ; R10.1@825.96,264.31 837,275.35 837,282.82 859.87,305.7 ; 859.9,305.7 877.9,323.7 878.04,323.7 889.69,335.35 889.69,335.51 895.39,341.21 U1.11@895.39,370.16
GND: AGND.1 C1.1 C4.1 C5.2 C11.2 Cbias.2 Cc1.2 Cc2.1 Cd.1 Cin1.2 Cin2.2 Cin3.2 Cin4.2 Cin5.2 Cin6.2 Cin7.2 Cin8.2 Co1.2 Co2.2 Co3.2 Co4.2 Co5.2 Co6.2 Co7.2 Css.2 CT1.1 Cvcc.2 J3.1 J4.1 R2.1 R8.1 R10.2 R14.2 Rs1.1 RT1.1 U1.10 U1.13 U1.14 U1.22 U1.29 | length 1025.6
  Top Layer w10: Rs1.1@985.61,1253.91 v6(985.61,1296.19)
  Mid-Layer 3 w10: v5(801,781.75) 823,803.75 823,828.49 908,913.49 908,1210 985.61,1287.61 v6(985.61,1296.19)
  Bottom Layer w10: Cc2.1@887.44,270.75 887.44,285.11 920.98,318.65 U1.10@920.98,370.16 ; U1.29@997.75,529 U1.22@997.75,594.57 Cbias.2@997.75,684.75 ; C1.1@1253.16,397.72 1280.72,370.16 1336.34,370.16
  Bottom Layer w20: R14.2@789,757.97 R14.2@789,760.31 789,769.75 v5(801,781.75)
  other v1: 1665,272.57 303,274.23 1543,312.74 1792.16,321.5 177.5,328 437,328 124.38,461 484,461 1482,461 1840,461 1532.02,585 1794,587.37 169,590.85 438.17,590.85 1665,636 303,643.36 496.29,690 528.1,690 561.17,690 1386,690 1420.5,690 1455,690 515,726 545,726 1399,726 1438,727
  other v3: 982.16,854.75 982.16,897.37 982.16,940 982.16,982.62 982.16,1025.25 982.16,1067.87 982.16,1110.5 982.16,1153.12 982.16,1195.75
  other v4: 906.22,443 945.59,443 984.96,443 1024.33,443 1063.7,443 906.22,482.37 945.59,482.37 984.96,482.37 1024.33,482.37 1063.7,482.37 906.22,521.74 945.59,521.74 984.96,521.74 1024.33,521.74 1063.7,521.74
  other v7: 985.61,705.46
HDRV1: Rh1.1 U1.27 | length 639.5
  MidLayer2 w20: v3(729.03,679.15) 832.44,575.75 v5(1190.81,575.75)
  Bottom Layer w10: U1.27@1125.7,594.57 1125.7,565.39 1143.35,547.75 1162.81,547.75 v5(1190.81,575.75)
  Bottom Layer w20: v3(729.03,679.15) Rh1.1@729.03,700.81
HDRV2: QH2.4 U1.19 | length 959.8
  Top Layer w20: QH2.4@1308.06,1196.56 v3@1308.06,1209.38
  MidLayer2 w20: v5@920.98,645.75 920.98,690.9 976.83,746.75 1210.41,746.75 1342,878.33 1341.04,1185 ; v3@1309,1218 1341.04,1185.96
  Bottom Layer w13: U1.19@920.98,594.57 v5@920.98,645.75
  other v3: 1308.35,1219
  other v5: 921,647.26
LDRV1: QL1.4 U1.25 | length 1131.2
  Top Layer w20: v3(692.96,1403.75) 751,1403.75 769.58,1385.16 QL1.4@769.58,1366.16
  Mid-Layer 4 w20: v3(692.96,1403.75) 731.55,1403.75 848.16,1287.14 848.16,855.36 938.78,764.75 1003.75,764.75 1074.52,693.97 v5(1074.52,640.31)
  Bottom Layer w13: U1.25@1074.52,594.57 v5(1074.52,640.31)
LDRV2: Rl1.2 U1.21 | length 364.7
  Mid-Layer 3 w20: v5(972.16,640.75) 1068.16,736.75 1151.16,736.75 1178.16,763.75 v3@1178.16,811.75
  Bottom Layer w13: U1.21@972.16,594.57 v5(972.16,640.75)
  Bottom Layer w20: v3@1178.16,811.75 Rl1.2@1191.72,811.75
  other v3: 1178.16,817
MODE: R7.1 R8.2 U1.4 | length 256.3
  Bottom Layer w10: U1.4@1074.52,370.16 1074.52,340.29 1137.07,277.75 1151,277.75 1201.81,226.93 R8.2@1201.81,217.65 ; R8.2@1206.4,226.96 R7.1@1249.3,226.96
NetC13_1: C13.1 R14.1 U1.15 | length 127.3
  Bottom Layer w10: R14.1@778.4,705.19 789,694.59 789,649.7 818.62,620.08 U1.15@818.62,594.57
NetC13_2: C13.2 R13.1 U1.16 | length 110.5
  Bottom Layer w10: R13.1@833.52,700.63 R13.1@844.21,689.94
  Bottom Layer w13: U1.16@844.21,594.57 R13.1@844.21,689.94
NetC14_2: C14.2 SYNC.1 | length 110.9
  Top Layer w10: C14.2@1035.77,204.44 1130.64,204.44 SYNC.1@1141.95,215.75
NetCc1_1: Cc1.1 Rc.1 | length 46
  Bottom Layer w10: Cc1.1@871.96,172.19 Cc1.1@874,172.19 Rc.1@917.96,172.19
NetD1_1: D1.1 R5.2 | length 102.7
  Bottom Layer w10: R5.2@1265.72,299.75 1319.75,299.75 1332.44,312.44 D1.1@1363.16,312.44
NetQH1_4: QH1.4 Rh1.2 | length 352.1
  Top Layer w20: v3@654.43,1091 QH1.4@654.43,1114
  MidLayer2 w20: v3@654,1092 v3(654,1091) 654.43,852.52 v3@717.81,789.13
  other v3: 728.66,779.99
NetQl1_1: QL1.1 QL1.2 QL1.3 QL2.1 QL2.2 QL2.3 R13.2 Rs1.2 | length 702
  Top Layer w10: Rs1.2@982.03,1376.32 985.61,1372.74 v6(985.61,1333.26)
  Mid-Layer 3 w10: v5(845.26,782.33) 845.26,818.01 930,902.75 930,1200 1013,1283 1013,1315 994.74,1333.26 v6(985.61,1333.26)
  Bottom Layer w10: R13.2@843.56,760.31 v5@843.56,780.62
NetQL2_4: QL2.4 Rl1.1 | length 509.7
  Top Layer w20: v7@1189.43,1253.26 QL2.4@1189.43,1275
  Mid-Layer 3 w20: v3@1181,871.75 v3(1178.16,871.75) 1124.25,871.75 1111.28,884.72 1111.28,1176.12 v7(1188.16,1253)
  Bottom Layer w20: Rl1.1@1181,871.75 Rl1.1@1193.72,871.75
NetR12_1: R12.1 R16.2 | length 44.4
  Bottom Layer w10: R16.2@687.96,210.19 688.96,209.19 R12.1@731.96,209.19
NetR15_1: R15.1 TRIM.1 | length 115.3
  Top Layer w15: v1(776.81,192.75) 788,192.75 812.82,217.57 812.82,228.75 824.82,240.75 TRIM.1@824.82,249.75
  Top Layer w20: TRIM.1@813.11,227.9 TRIM.1@824.82,239.61
  Bottom Layer w15: v1(776.81,192.75) R15.1@776.81,208.01
PGOOD: PGOOD.1 Rpg.2 U1.17 | length 270.2
  Top Layer w10: PGOOD.1@824,459.75 824,500.58 v1(848.16,524.75) 890.16,566.75 946.3,566.75 Rpg.2@957.6,578.05
  Bottom Layer w10: 854.46,537.25 869.8,552.59 U1.17@869.8,594.57
SLOPE: C5.1 U1.7 | length 149.2
  Bottom Layer w10: U1.7@997.75,370.16 997.75,242.72 C5.1@1013.16,227.31
SS: Css.1 U1.8 | length 137.9
  Bottom Layer w10: Css.1@972,233.75 972,281.75 972.16,281.58 U1.8@972.16,370.16 ; Css.1@972.16,238.16 Css.1@972.96,238.96
SW1: Cb1.2 L1.1 QH1.1 QH1.2 QH1.3 QL1.5 QL1.6 QL1.7 QL1.8 QL1.9 U1.28 | length 1157.6
  MidLayer1 w20: v2@653,1146 v2(653,1170) v2@653,1196
  MidLayer2 w20: v2@653.43,1145 653.21,1144.79 621,1113 621,838.75 853,606.75 1134.83,606.75 v5(1165.96,637.88) ; v2@654,1147 v2@654,1195
  Bottom Layer w13: U1.28@1151.3,594.57 1151.3,623.22 v5(1165.96,637.88) 1165.96,647.89 Cb1.2@1184.66,666.6
  other v2: 653,1145 653.43,1195.75 656,1283 686,1283 715,1283 656,1309 686,1309 714.96,1309 656,1334 686,1334 714.96,1334 656,1360 686,1360 715,1360
SW2: Cb2.1 L1.2 QH2.1 QH2.2 QH2.3 QL2.5 QL2.6 QL2.7 QL2.8 QL2.9 U1.18 | length 931.6
  MidLayer1 w20: v2(1311,1118) v2(1311,1143) v2(1311,1167)
  MidLayer2 w20: v5@898.16,711.86 961.05,774.75 1198.82,774.75 1309.96,885.89 ; 1310.49,886.42 1310.92,1118 v2(1311,1143) v2@1311,1164
  Bottom Layer w13: Cb2.1@890.4,688.75 Cb2.1@890.4,682 890.4,638.85 895.39,633.86 U1.18@895.39,594.57
  Bottom Layer w20: Cb2.1@895.39,686.99 v5(895.39,711.86)
  other v2: 1248,1280 1280,1280 1310.49,1280 1248,1306 1280,1306 1310.49,1306 1248,1331 1280,1331 1310.49,1331 1248,1357 1280,1357 1310,1357
SYNC: C14.1 CT1.2 RT1.2 U1.6 | length 220.8
  Top Layer w20: C14.1@1036.59,261.15 v1(1036.59,286.42)
  Bottom Layer w10: U1.6@1023.34,370.16 1023.34,319.74 1036.59,306.49 v1(1036.59,286.42) 1057.96,265.05 CT1.2@1057.96,223.31 ; CT1.2@1062.16,227.31 RT1.2@1096.51,227.31
VCC: Cvcc.1 D2.2 D3.2 R7.2 Rpg.1 U1.23 | length 939.5
  Top Layer w10: Rpg.1@1012.72,578.05 1012.72,636.31 v1(1023.16,646.75)
  Mid-Layer 3 w10: v1(1023.16,646.75) 1256.26,413.65 1256.26,300.21 v3@1303.72,252.75
  Bottom Layer w10: v1@1021.96,648.13 1021.96,725.37 Cvcc.1@1030.13,733.55 ; v1(1023.16,646.75) v1@1023.34,646.57 ; v1@1023.25,646.84 v1@1023.34,646.75 ; D3.2@1028.26,777.75 1028.26,735.42 Cvcc.1@1030.13,733.55 ; Cvcc.1@1030.46,729 1041.46,740 1075.62,740 1077.62,742 1125.19,742 1133.19,750 1133.19,751.48 1140.8,759.09 1140.95,759.09 D2.2@1146.19,764.33 ; Cvcc.1@1033.33,736.75 Cvcc.1@1030.13,733.55 ; D2.2@1150.63,770.07 1151.06,770.07 D2.2@1154.64,773.65 ; R7.2@1295.56,227.75 1295.56,243.31 v3(1305,252.75)
  Bottom Layer w13: U1.23@1023.34,594.57 v1@1023.34,646.57
VIN: Cin1.1 Cin2.1 Cin3.1 Cin4.1 Cin5.1 Cin6.1 Cin7.1 D1.2 J1.1 QH1.5 QH1.6 QH1.7 QH1.8 QH1.9 R1.2 R6.1 | length 2626.7
  Mid-Layer 3 w10: J1.1@164.87,1096.98 124.83,1096.98 52,1024.15 52,377 389,40 1201.98,40 1339,177.01 1339,397.56 v1(1325.65,410.9)
  Bottom Layer w10: R1.2@1303.16,397.72 1361.83,397.72 D1.2@1363.16,399.05 ; R6.1@1321,462.19 1321,415.56 v1(1325.65,410.9)
  other v1: 812,900.75 812,923.25 812,945.75 812,982.62 510.38,993 543.29,993 812,1004.75 495.38,1026.16 526.71,1026.16 558,1026.16 812,1026.75 303,1055.87 812,1064.75 812,1085.75 424.38,1100.35 175,1103 812,1106.74 118,1234 477.15,1234 425,1360 171,1367 303,1419
  other v2: 712,1117 743,1117 775,1117 712,1143 743,1143 775,1143 712,1168 743,1168 775,1168 712,1194 743,1194 775,1194